# Altium PCB FPS_Anzeige_V2.PcbDoc
Units mm, origin at the board's own origin, x right, y up, seen from the top; angles counter-clockwise.
Board outline 80 x 100 mm, 4 copper layers (F.Cu, In1.Cu, In2.Cu, B.Cu); 61 components, 55 nets, 226 pads, 117 vias.
Unrouted connection lines stored in the file: 3.
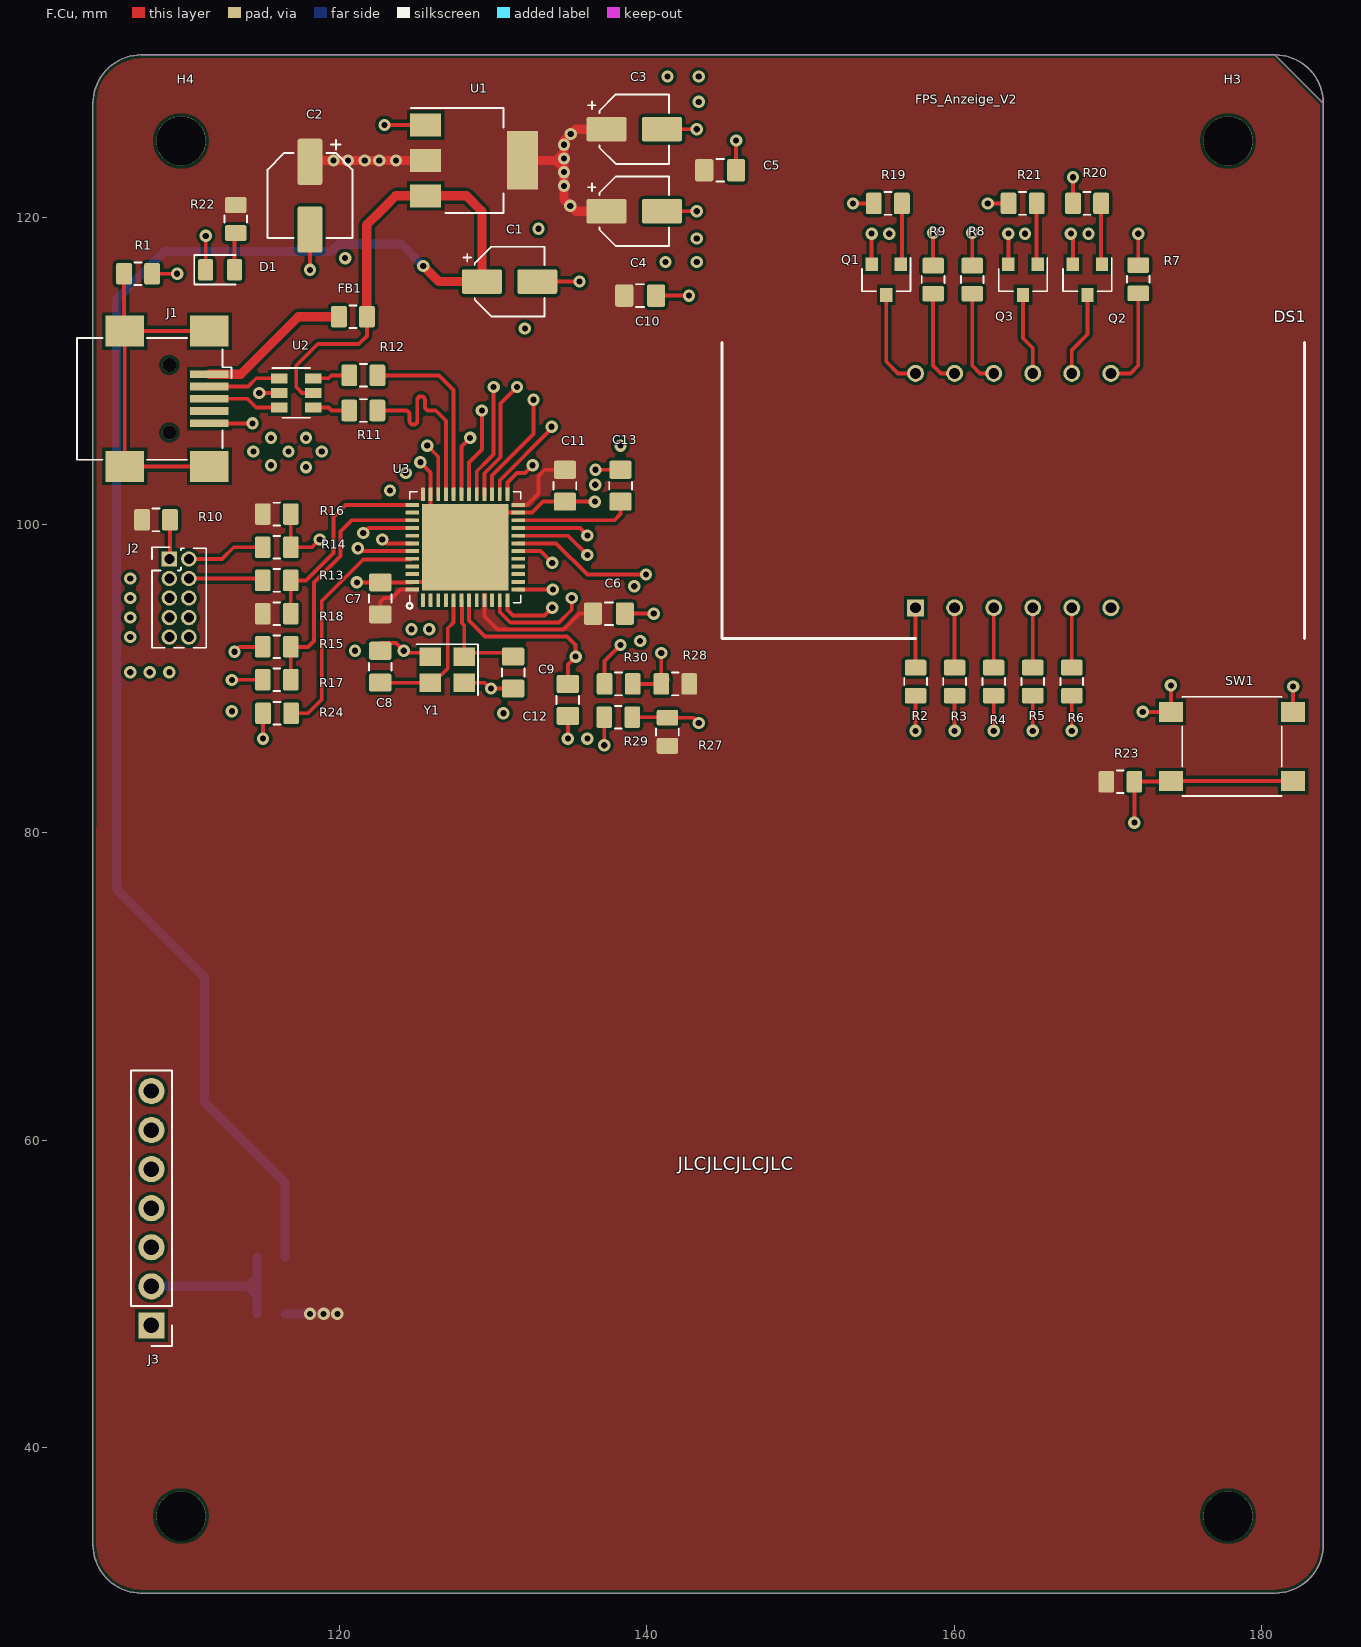
[diagram p0: F.Cu view]
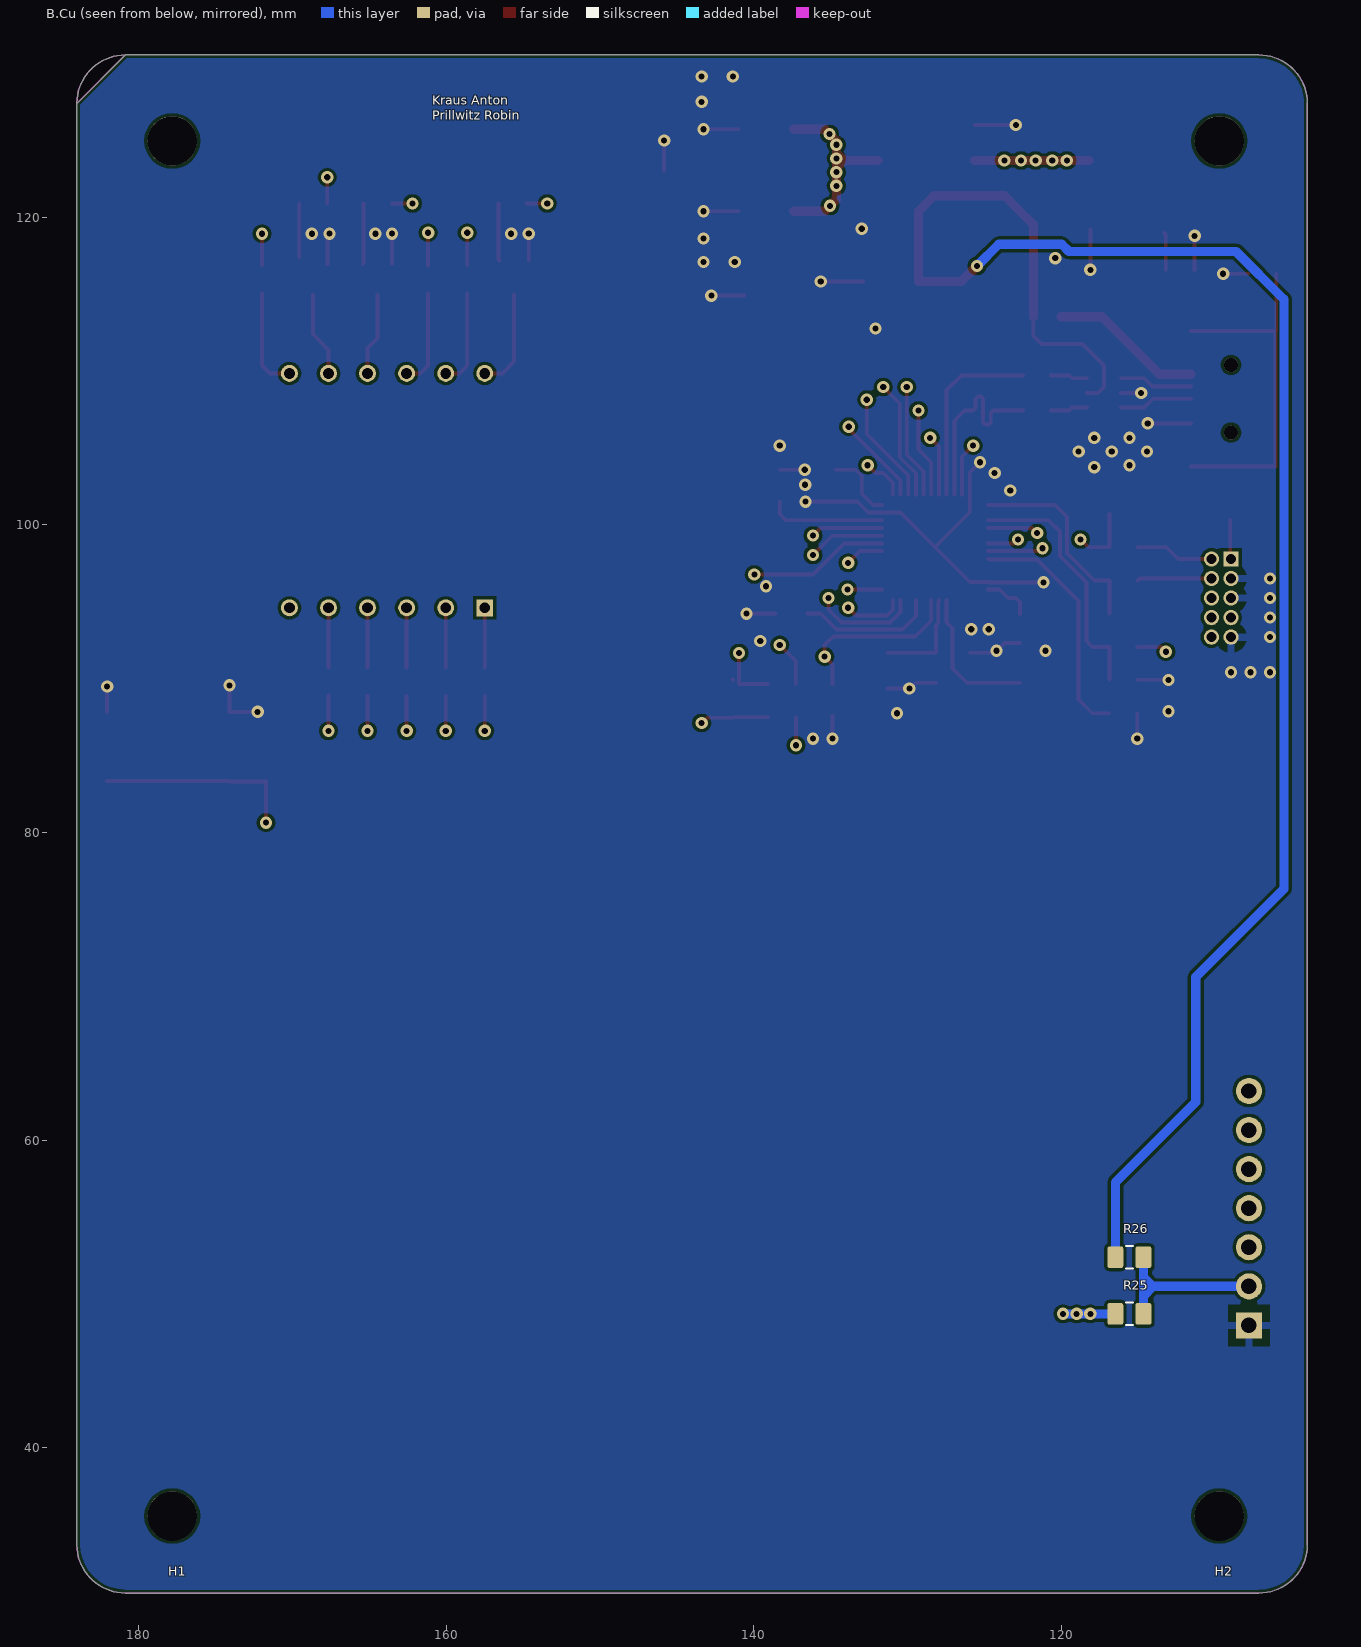
[diagram p1: B.Cu view, seen from below]
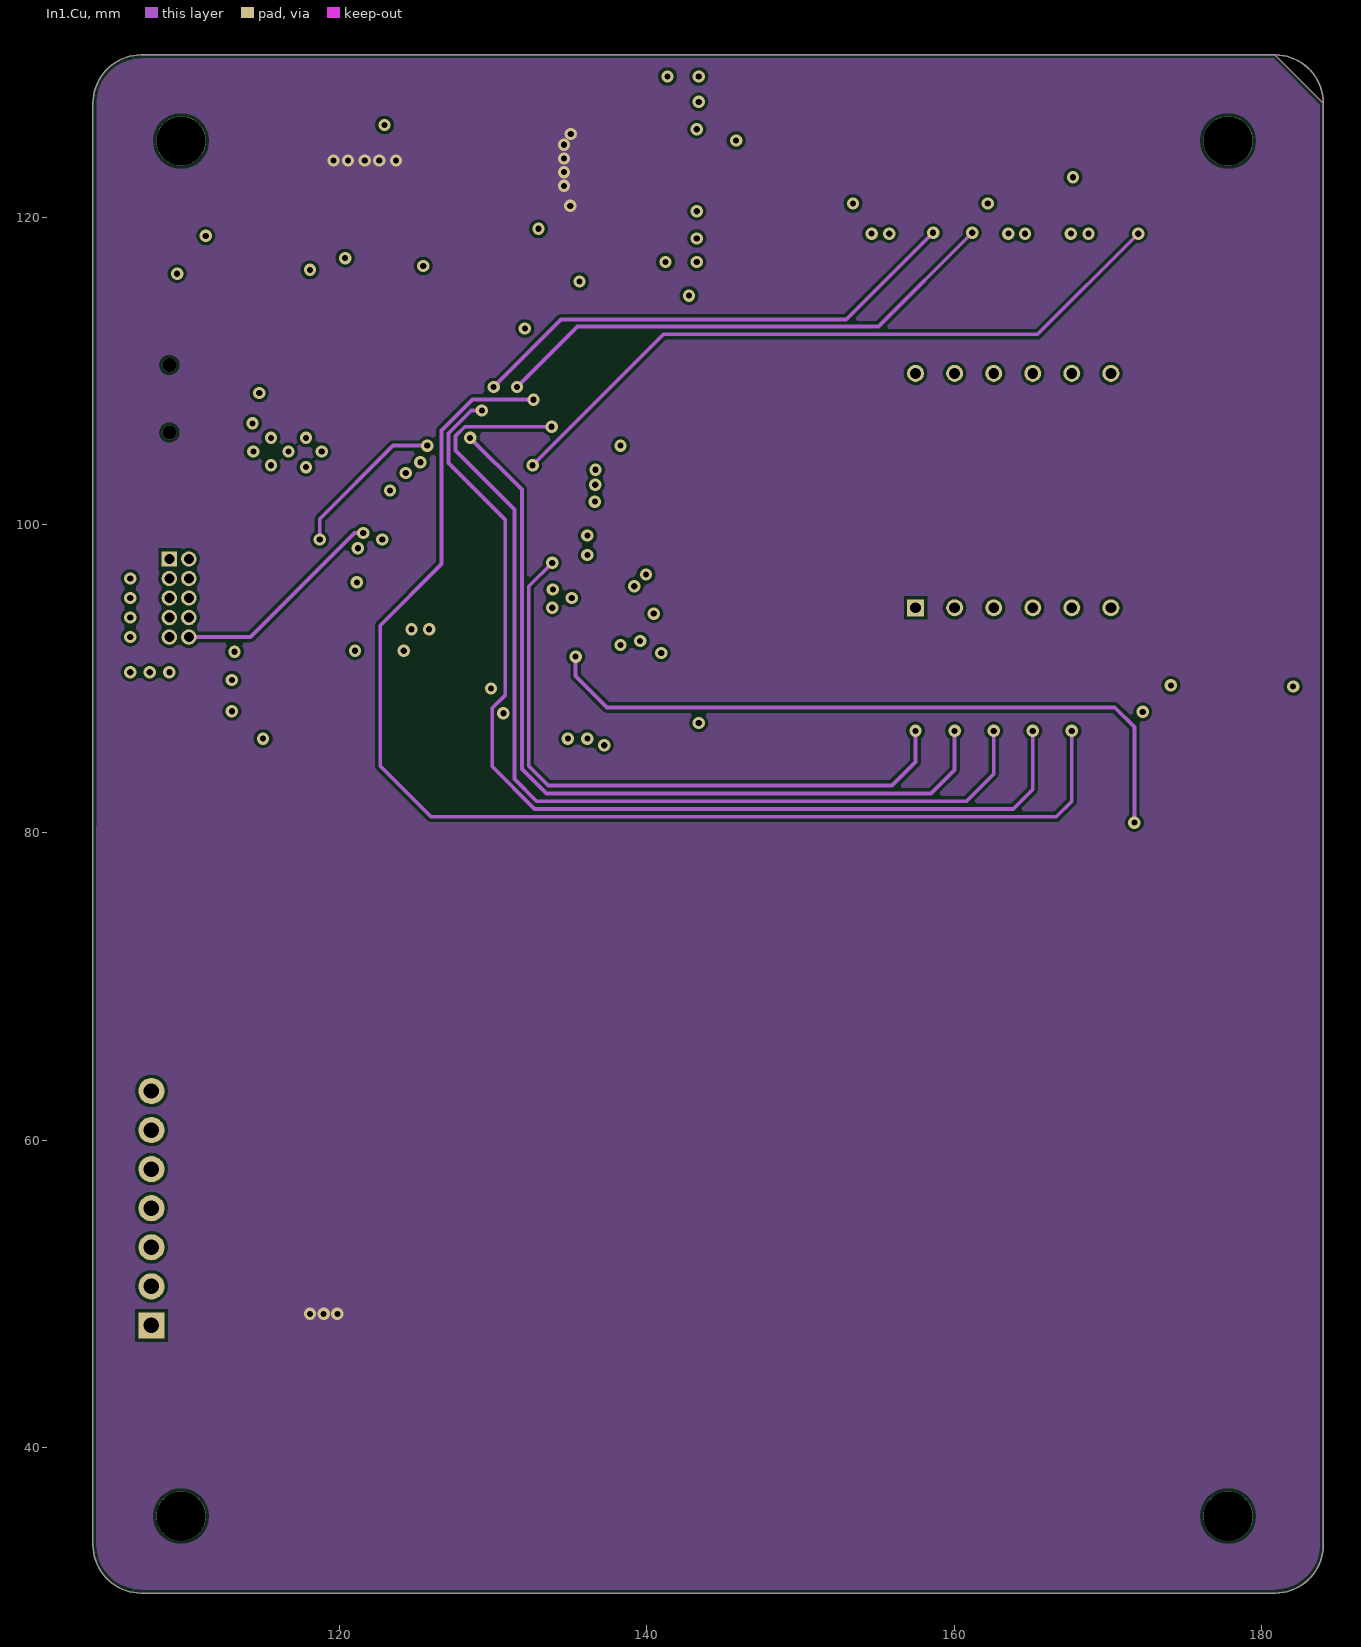
[diagram p2: In1.Cu]
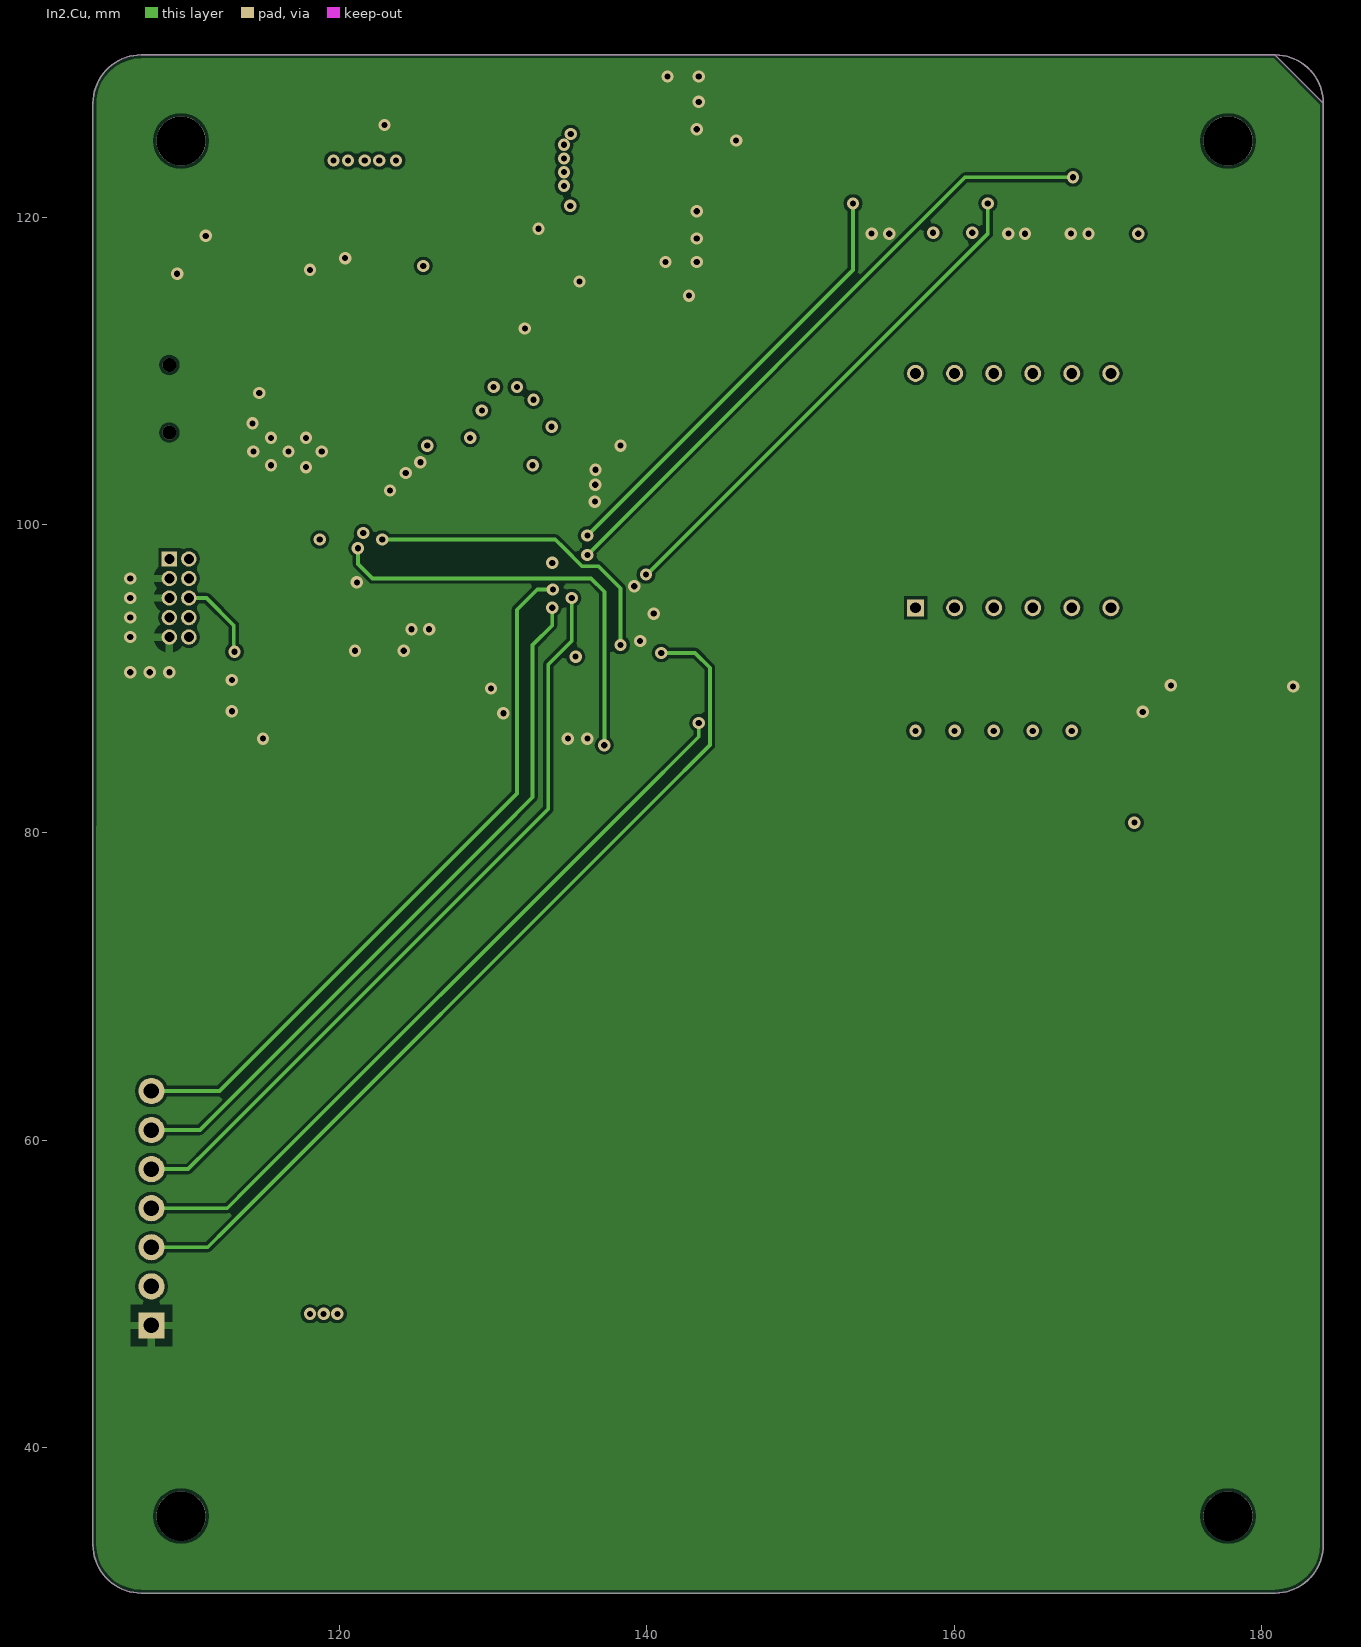
[diagram p3: In2.Cu]

## Layer stack, top to bottom
F.Mask: solder mask 0.0102, Solder Resist, Dk 3.5
F.Cu: signal copper 0.0356
Dielectric 1: dielectric 0.32, FR-4, Dk 4.8
In1.Cu: signal copper 0.0356
Dielectric2: dielectric 0.32, FR-4, Dk 4.8
In2.Cu: signal copper 0.0356
Dielectric3: dielectric 0.32, FR-4, Dk 4.8
B.Cu: signal copper 0.0356
B.Mask: solder mask 0.0102, Solder Resist, Dk 3.5

## Board outline
183.998,127.406 ccw(c180.848,127.406) 180.848,130.556 107.152,130.561 ccw(c107.152,127.411) 104.003,127.411 104,33.706 ccw(c107.15,33.706) 107.15,30.556 180.848,30.561 ccw(c180.848,33.711) 183.998,33.711 183.998,127.406 ccw(c180.848,127.406) 183.998,127.406

## Design rules (kind name [scope] priority, off if disabled: settings)
Clearance "Clearence 0,2_NetClass" [InNetClass('Default')] p1: gap=0.2 ignorepadtopadclearanceinfootprint=FALSE
Clearance "Clearence 0,2_Polygon" [InNamedPolygon('F.Cu-+3V3') OR InNamedPolygon('B.Cu-GND') OR InNamedPolygon('In1.Cu-+3V3') OR InNamedPolygon('In2.Cu-GND')] p2: gap=0.2 ignorepadtopadclearanceinfootprint=FALSE
HoleSize "Hole Size (Default)" [All] p1: absolutevalues=TRUE maxlimit=10 minlimit=0 maxpercent=80.000 minpercent=20.000
MinimumSolderMaskSliver [All] p1: minsoldermaskwidth=0
PolygonConnect Polygon_In2.Cu-GND_ConnectDirect [IsNamedPolygon('In2.Cu-GND') vs IsVia] p1: connectstyle=Direct reliefconductorwidth=0.254 reliefentries=4 polygonreliefangle="90 Angle" airgapwidth=0.254
PolygonConnect Polygon_In2.Cu-GND_ConnectRelief45 [IsNamedPolygon('In2.Cu-GND') vs (IsThruPin or IsSMTPin) and (PadShape_AllLayers = 'Round')] p2: connectstyle=Relief reliefconductorwidth=0.508 reliefentries=4 polygonreliefangle="45 Angle" airgapwidth=0.508
PolygonConnect Polygon_In2.Cu-GND_ConnectRelief90 [IsNamedPolygon('In2.Cu-GND') vs (IsThruPin or IsSMTPin) and (PadShape_AllLayers <> 'Round')] p3: connectstyle=Relief reliefconductorwidth=0.508 reliefentries=4 polygonreliefangle="90 Angle" airgapwidth=0.508
PolygonConnect Polygon_In1.Cu-+3V3_ConnectDirect [IsNamedPolygon('In1.Cu-+3V3') vs IsVia] p4: connectstyle=Direct reliefconductorwidth=0.254 reliefentries=4 polygonreliefangle="90 Angle" airgapwidth=0.254
PolygonConnect Polygon_In1.Cu-+3V3_ConnectRelief45 [IsNamedPolygon('In1.Cu-+3V3') vs (IsThruPin or IsSMTPin) and (PadShape_AllLayers = 'Round')] p5: connectstyle=Relief reliefconductorwidth=0.508 reliefentries=4 polygonreliefangle="45 Angle" airgapwidth=0.508
PolygonConnect Polygon_In1.Cu-+3V3_ConnectRelief90 [IsNamedPolygon('In1.Cu-+3V3') vs (IsThruPin or IsSMTPin) and (PadShape_AllLayers <> 'Round')] p6: connectstyle=Relief reliefconductorwidth=0.508 reliefentries=4 polygonreliefangle="90 Angle" airgapwidth=0.508
PolygonConnect Polygon_B.Cu-GND_ConnectDirect [IsNamedPolygon('B.Cu-GND') vs IsVia or IsSMTPin] p7: connectstyle=Direct reliefconductorwidth=0.254 reliefentries=4 polygonreliefangle="90 Angle" airgapwidth=0.254
PolygonConnect Polygon_B.Cu-GND_ConnectRelief45 [IsNamedPolygon('B.Cu-GND') vs IsThruPin and (PadShape_AllLayers = 'Round')] p8: connectstyle=Relief reliefconductorwidth=0.508 reliefentries=4 polygonreliefangle="45 Angle" airgapwidth=0.508
PolygonConnect Polygon_B.Cu-GND_ConnectRelief90 [IsNamedPolygon('B.Cu-GND') vs IsThruPin and (PadShape_AllLayers <> 'Round')] p9: connectstyle=Relief reliefconductorwidth=0.508 reliefentries=4 polygonreliefangle="90 Angle" airgapwidth=0.508
PolygonConnect Polygon_F.Cu-+3V3_ConnectDirect [IsNamedPolygon('F.Cu-+3V3') vs IsVia or IsSMTPin] p10: connectstyle=Direct reliefconductorwidth=0.254 reliefentries=4 polygonreliefangle="90 Angle" airgapwidth=0.254
PolygonConnect Polygon_F.Cu-+3V3_ConnectRelief45 [IsNamedPolygon('F.Cu-+3V3') vs IsThruPin and (PadShape_AllLayers = 'Round')] p11: connectstyle=Relief reliefconductorwidth=0.508 reliefentries=4 polygonreliefangle="45 Angle" airgapwidth=0.508
PolygonConnect Polygon_F.Cu-+3V3_ConnectRelief90 [IsNamedPolygon('F.Cu-+3V3') vs IsThruPin and (PadShape_AllLayers <> 'Round')] p12: connectstyle=Relief reliefconductorwidth=0.508 reliefentries=4 polygonreliefangle="90 Angle" airgapwidth=0.508
RoutingVias [All] p1: holewidth=0.711 width=1.27 viastyle="Through Hole" minholewidth=0.711 minwidth=1.27 maxholewidth=0.711 maxwidth=1.27
SilkToSilkClearance [All] p1: silktosilkclearance=0
SilkToSolderMaskClearance [IsPad] p1: minsilkscreentomaskgap=0 clearancetoexposedcopper=TRUE
SolderMaskExpansion [All] p1: expansion=0.102 istentingtop=FALSE
Width [All] p1: maxlimit=10 minlimit=0.2 preferedwidth=0.25 minimp=50.000000 maximp=50.000000 favimp=50.000000
26 further rules are at their usual default settings.

## Classes and differential pairs
net class Default: +3V3 +5V BOOT0 CS DAA DAB DAC DAD DADP DAE DAF DAG DC GND JTAG_RESET JTAG_SWDCLK JTAG_SWDIO JTAG_SWO Net-(C13-Pad1) Net-(D1-Pad2) Net-(DS1-Pad1) Net-(DS1-Pad2) Net-(DS1-Pad3) Net-(DS1-Pad4) Net-(DS1-Pad5) Net-(DS1-Pad7) Net-(DS1-Pad8) Net-(DS1-Pad9) Net-(DS1-Pad10) Net-(DS1-Pad11) Net-(DS1-Pad12) Net-(FB1-Pad2) Net-(J1-Pad2) Net-(J1-Pad3) Net-(J1-Pad6) Net-(J2-Pad1) Net-(J3-Pad2) Net-(Q1-Pad1) Net-(Q2-Pad1) Net-(Q3-Pad1) Net-(R11-Pad2) Net-(R12-Pad2) Net-(R29-Pad2) Net-(R30-Pad2) OSC_IN OSC_OUT RES RESET SCL SDA SEG_0 SEG_1 SEG_2 USBD+ USBD-

## Components (designator, comment, footprint, x,y, rotation, side; value= is the part's Value field where it differs from the comment)
C1 "10u" CP_Elec_4x4.5 131.086,115.824 r0 top
C2 "100u" CP_Elec_5x5.3 118.11,121.412 r270 top
C3 "10u" CP_Elec_4x4.5 139.192,125.73 r0 top
C4 "10u" CP_Elec_4x4.5 139.192,120.396 r0 top
C5 "100n" C_0805_2012Metric_Pad1.18x1.45mm_HandSolder 144.78,123.063 r0 top
C6 "100n" C_0805_2012Metric_Pad1.18x1.45mm_HandSolder 137.541,94.234 r0 top
C7 "100n" C_0805_2012Metric_Pad1.18x1.45mm_HandSolder 122.682,95.228 r90 top
C8 "12p" C_0805_2012Metric_Pad1.18x1.45mm_HandSolder 122.682,90.783 r90 top
C9 "12p" C_0805_2012Metric_Pad1.18x1.45mm_HandSolder 131.318,90.402 r270 top
C10 "100n" C_0805_2012Metric_Pad1.18x1.45mm_HandSolder 139.577,114.91 r0 top
C11 "100n" C_0805_2012Metric_Pad1.18x1.45mm_HandSolder 134.683,102.552 r270 top
C12 "100n" C_0805_2012Metric_Pad1.18x1.45mm_HandSolder 134.874,88.624 r270 top
C13 "100n" C_0805_2012Metric_Pad1.18x1.45mm_HandSolder 138.303,102.552 r90 top
D1 "LED" LED_0805_2012Metric 112.268,116.586 r0 top
DS1 "BC56-12EWA" DIPS1524W50P254L3760H835Q12N 157.48,94.615 r90 top
FB1 "Ferrite_Bead" R_0805_2012Metric#1 120.904,113.538 r180 top
H1 "MountingHole" MountingHole_3.2mm_M3_DIN965 177.8,35.56 r180 bottom
H2 "MountingHole" MountingHole_3.2mm_M3_DIN965 109.728,35.56 r180 bottom
H3 "MountingHole" MountingHole_3.2mm_M3_DIN965 177.8,124.968 r0 top
H4 "MountingHole" MountingHole_3.2mm_M3_DIN965 109.728,124.968 r0 top
J1 "USB_B_Mini" USB_Mini-B_Wuerth_65100516121_Horizontal 108.966,108.204 r270 top
J2 "Conn_ARM_JTAG_SWD_10" PinHeader_2x05_P1.27mm_Vertical 108.966,97.79 r0 top
J3 "Conn_01x07" PinHeader_1x07_P2.54mm_Vertical 107.8,47.96 r180 top
Q1 "BC817" SOT-23 155.575,115.951 r270 top
Q2 "BC817" SOT-23 168.656,115.951 r270 top
Q3 "BC817" SOT-23 164.465,115.951 r270 top
R1 "33k" R_0805_2012Metric#1 106.934,116.332 r0 top
R2 "100" R_0805_2012Metric#1 157.48,89.813 r270 top
R3 "100" R_0805_2012Metric#1 160.02,89.813 r270 top
R4 "100" R_0805_2012Metric#1 162.56,89.813 r270 top
R5 "100" R_0805_2012Metric#1 165.1,89.813 r270 top
R6 "100" R_0805_2012Metric#1 167.64,89.816 r270 top
R7 "100" R_0805_2012Metric#1 171.958,115.975 r90 top
R8 "100" R_0805_2012Metric#1 161.163,115.951 r90 top
R9 "100" R_0805_2012Metric#1 158.623,115.951 r90 top
R10 "100" R_0805_2012Metric#1 108.101,100.33 r0 top
R11 "15" R_0805_2012Metric#1 121.579,107.442 r180 top
R12 "15" R_0805_2012Metric#1 121.579,109.728 r180 top
R13 "33" R_0805_2012Metric#1 115.951,96.393 r180 top
R14 "33" R_0805_2012Metric#1 115.951,98.552 r180 top
R15 "33" R_0805_2012Metric#1 115.951,92.075 r180 top
R16 "10k" R_0805_2012Metric#1 115.951,100.711 r0 top
R17 "10k" R_0805_2012Metric#1 115.953,89.941 r180 top
R18 "10k" R_0805_2012Metric#1 115.951,94.234 r0 top
R19 "10k" R_0805_2012Metric#1 155.678,120.904 r0 top
R20 "10k" R_0805_2012Metric#1 168.632,120.904 r0 top
R21 "10k" R_0805_2012Metric#1 164.441,120.904 r0 top
R22 "470" R_0805_2012Metric#1 113.284,119.888 r270 top
R23 "NC" R_0805_2012Metric#1 170.791,83.312 r0 top
R24 "100k" R_0805_2012Metric#1 115.975,87.757 r180 top
R25 "0R" R_0805_2012Metric#2 115.57,48.711 r0 bottom
R26 "0R" R_0805_2012Metric#2 115.57,52.394 r0 bottom
R27 "4.7k" R_0805_2012Metric#1 141.351,86.55 r90 top
R28 "4.7k" R_0805_2012Metric#1 141.859,89.662 r180 top
R29 "33" R_0805_2012Metric#1 138.176,89.662 r180 top
R30 "33" R_0805_2012Metric#1 138.152,87.503 r180 top
SW1 "SW_Push" SW_Push_1P1T_NO_6x6mm_H9.5mm 178.054,85.598 r180 top
U1 "AMS1117-3.3" SOT-223-3_TabPin2 128.778,123.698 r0 top
U2 "USBLC6-2SC6" SOT-23-6 117.221,108.585 r0 top
U3 "STM32F411CCUx" QFN-48-1EP_7x7mm_P0.5mm_EP5.6x5.6mm 128.202,98.552 r90 top
Y1 "Crystal_GND24" Crystal_SMD_3225-4Pin_3.2x2.5mm 127.043,90.59 r180 top

## Footprints (in the part's own frame and the unit in brackets; to place one, negate y for a bottom-side part, rotate by r counter-clockwise, add the part's x,y. Pads: shape width x height; smd on the part's side, far side on the other; paste and mask are expansions set on the pad)
C_0805_2012Metric_Pad1.18x1.45mm_HandSolder [mm]
  rrect21% 1.175x1.45 smd mask+0: 1(-1.038,0) 2(1.038,0)
  silkscreen extent -0.26,-0.73 0.26,0.73
CP_Elec_4x4.5 [mm]
  rrect16% 2.6x1.6 smd mask+0: 1(-1.8,0) 2(1.8,0)
  silkscreen extent -3,-2.26 2.26,2.26
CP_Elec_5x5.3 [mm]
  rrect16% 3x1.6 smd mask+0: 1(-2.2,0) 2(2.2,0)
  silkscreen extent -3.62,-2.76 2.76,2.76
Crystal_SMD_3225-4Pin_3.2x2.5mm [mm]
  rect 1.4x1.2 smd mask+0: 1(-1.1,-0.85) 2(1.1,-0.85) 3(1.1,0.85) 4(-1.1,0.85)
  silkscreen extent -2,-1.65 2,1.65
DIPS1524W50P254L3760H835Q12N [mm]
  rect 1.1x1.1 hole 0.7 paste-1.1 mask+0: 1(0,0)
  round 1.1 hole 0.7 paste-1.1 mask+0: 2(0,-2.54) 3(0,-5.08) 4(0,-7.62) 5(0,-10.16) 6(0,-12.7) 7(15.24,-12.7) 8(15.24,-10.16) 9(15.24,-7.62) 10(15.24,-5.08) 11(15.24,-2.54) 12(15.24,0)
  silkscreen extent -2,-25.27 17.24,12.57
LED_0805_2012Metric [mm]
  rrect25% 0.975x1.4 smd mask+0: 1(-0.937,0) 2(0.937,0)
  silkscreen extent -1.69,-0.96 1,0.96
MountingHole_3.2mm_M3_DIN965 [mm]
  round 3.2 hole 3.2 paste-3.2 mask+0: 1(0,0)
PinHeader_1x07_P2.54mm_Vertical [mm]
  rect 1.7x1.7 hole 1 paste-1.7 mask+0: 1(0,0)
  rrect100% 1.7x1.7 hole 1 paste-1.7 mask+0: 2(0,-2.54) 3(0,-5.08) 4(0,-7.62) 5(0,-10.16) 6(0,-12.7) 7(0,-15.24)
  silkscreen extent -1.33,-16.57 1.33,1.33
PinHeader_2x05_P1.27mm_Vertical [mm]
  rect 1x1 hole 0.65 paste-1 mask+0: 1(0,0)
  rrect100% 1x1 hole 0.65 paste-1 mask+0: 2(1.27,0) 3(0,-1.27) 4(1.27,-1.27) 5(0,-2.54) 6(1.27,-2.54) 7(0,-3.81) 8(1.27,-3.81) 9(0,-5.08) 10(1.27,-5.08)
  silkscreen extent -1.13,-5.77 2.4,0.76
QFN-48-1EP_7x7mm_P0.5mm_EP5.6x5.6mm [mm]
  rrect25% 0.875x0.25 smd mask+0: 1(-3.437,2.75) 2(-3.437,2.25) 3(-3.437,1.75) 4(-3.437,1.25) 5(-3.437,0.75) 6(-3.437,0.25) 7(-3.437,-0.25) 8(-3.437,-0.75) 9(-3.437,-1.25) 10(-3.437,-1.75) 11(-3.437,-2.25) 12(-3.437,-2.75) 25(3.437,-2.75) 26(3.437,-2.25) 27(3.437,-1.75) 28(3.437,-1.25) 29(3.437,-0.75) 30(3.437,-0.25) 31(3.437,0.25) 32(3.437,0.75) 33(3.437,1.25) 34(3.437,1.75) 35(3.437,2.25) 36(3.437,2.75)
  rrect25% 0.25x0.875 smd mask+0: 13(-2.75,-3.437) 14(-2.25,-3.437) 15(-1.75,-3.437) 16(-1.25,-3.437) 17(-0.75,-3.437) 18(-0.25,-3.437) 19(0.25,-3.437) 20(0.75,-3.437) 21(1.25,-3.437) 22(1.75,-3.437) 23(2.25,-3.437) 24(2.75,-3.437) 37(2.75,3.437) 38(2.25,3.437) 39(1.75,3.437) 40(1.25,3.437) 41(0.75,3.437) 42(0.25,3.437) 43(-0.25,3.437) 44(-0.75,3.437) 45(-1.25,3.437) 46(-1.75,3.437) 47(-2.25,3.437) 48(-2.75,3.437)
  rect 5.6x5.6 smd paste-5.6 mask+0: 49(0,0)
  rrect22% 1.13x1.13 on Top Paste mask-1.13: Un1(2.1,-2.1) Un2(2.1,-0.7) Un3(2.1,0.7) Un4(2.1,2.1) Un5(0.7,-2.1) Un6(0.7,-0.7) Un7(0.7,0.7) Un8(0.7,2.1) Un9(-0.7,-2.1) Un10(-0.7,-0.7) Un11(-0.7,0.7) Un12(-0.7,2.1) Un13(-2.1,-2.1) Un14(-2.1,-0.7) Un15(-2.1,0.7) Un16(-2.1,2.1)
  silkscreen extent -3.61,-3.61 3.61,3.61
R_0805_2012Metric#1 [mm]
  rrect24% 1.025x1.4 smd mask+0: 1(-0.913,0) 2(0.913,0)
  silkscreen extent -0.23,-0.73 0.23,0.73
R_0805_2012Metric#2 [mm]
  rrect24% 1.025x1.4 smd mask+0: 1(0.913,0) 2(-0.913,0)
  silkscreen extent -0.23,-0.73 0.23,0.73
SOT-23 [mm]
  rect 0.9x0.8 smd mask+0: 1(-1,0.95) 2(-1,-0.95) 3(1,0)
  silkscreen extent -1.4,-1.58 0.76,1.58
SOT-23-6 [mm]
  rect 1.06x0.65 smd mask+0: 1(-1.1,0.95) 2(-1.1,0) 3(-1.1,-0.95) 4(1.1,-0.95) 5(1.1,0) 6(1.1,0.95)
  silkscreen extent -1.55,-1.61 0.9,1.61
SOT-223-3_TabPin2 [mm]
  rect 2x1.5 smd mask+0: 1(-3.15,2.3) 2(-3.15,0) 3(-3.15,-2.3)
  rect 2x3.8 smd mask+0: 2(3.15,0)
  silkscreen extent -4.1,-3.41 1.91,3.41
SW_Push_1P1T_NO_6x6mm_H9.5mm [mm]
  rect 1.55x1.3 smd mask+0: 1(-3.975,2.25) 1(3.975,2.25) 2(-3.975,-2.25) 2(3.975,-2.25)
  silkscreen extent -3.23,-3.23 3.23,3.23
USB_Mini-B_Wuerth_65100516121_Horizontal [mm]
  rect 0.5x2.5 smd mask+0: 1(-1.6,2.6) 2(-0.8,2.6) 3(0,2.6) 4(0.8,2.6) 5(1.6,2.6)
  rect 2x2.5 smd mask+0: 6(-4.4,2.6) 6(-4.4,-2.9) 6(4.4,2.6) 6(4.4,-2.9)
  round 0.9 hole 0.9 paste-0.9 mask+0: Un1(2.2,0) Un2(-2.2,0)
  silkscreen extent -3.96,-6.01 3.96,4.05

## Part data
C1 C3 C4: library part CP_Elec_4x4.5, "SMD capacitor, aluminum electrolytic, Nichicon, 4.0x4.5mm"
C2: library part CP_Elec_5x5.3, "SMD capacitor, aluminum electrolytic, Nichicon, 5.0x5.3mm"
C5 C6 C7 C8 C9 C10 C11 C12 C13: library part C_0805_2012Metric_Pad1.18x1.45mm_HandSolder, "Capacitor SMD 0805 (2012 Metric), square (rectangular) end terminal, IPC_7351 nominal with elongated pad for handsoldering. (Body size source: IPC-SM-782 page 76, https://www.pcb-3d.com/wordpress/wp-content/uploads/ipc-sm-782a_amendment_1_and_2.pdf, https://docs.google.com/spreadsheets/d/1BsfQQcO9C6DZCsRaXUlFlo91Tg2WpOkGARC1WS5S8t0/edit?usp=sharing), generated with kicad-footprint-generator"
D1: library part LED_0805_2012Metric, "LED SMD 0805 (2012 Metric), square (rectangular) end terminal, IPC_7351 nominal, (Body size source: https://docs.google.com/spreadsheets/d/1BsfQQcO9C6DZCsRaXUlFlo91Tg2WpOkGARC1WS5S8t0/edit?usp=sharing), generated with kicad-footprint-generator"
DS1: library part DIPS1524W50P254L3760H835Q12N, "BC56-12EWA_A"
FB1 R1 R2 R3 R4 R5 R6 R7 R8 R9 R10 R11 R12 R13 R14 R15 R16 R17 R18 R19 R20 R21 R22 R23 R24 R25 R26 R27 R28 R29 R30: library part R_0805_2012Metric, "Resistor SMD 0805 (2012 Metric), square (rectangular) end terminal, IPC_7351 nominal, (Body size source: IPC-SM-782 page 72, https://www.pcb-3d.com/wordpress/wp-content/uploads/ipc-sm-782a_amendment_1_and_2.pdf), generated with kicad-footprint-generator"
H1 H2 H3 H4: library part MountingHole_3.2mm_M3_DIN965, "Mounting Hole 3.2mm, no annular, M3, DIN965"
J1: library part USB_Mini-B_Wuerth_65100516121_Horizontal, "Mini USB 2.0 Type B SMT Horizontal 5 Contacts (https://katalog.we-online.de/em/datasheet/65100516121.pdf)"
J2: library part PinHeader_2x05_P1.27mm_Vertical, "Through hole straight pin header, 2x05, 1.27mm pitch, double rows"
J3: library part PinHeader_1x07_P2.54mm_Vertical, "Through hole straight pin header, 1x07, 2.54mm pitch, single row"
Q1 Q2 Q3: library part SOT-23, "SOT-23, Standard"
SW1: library part SW_Push_1P1T_NO_6x6mm_H9.5mm, "tactile push button, 6x6mm e.g. PTS645xx series, height=9.5mm"
U1: library part SOT-223-3_TabPin2, "module CMS SOT223 4 pins"
U2: library part SOT-23-6, "6-pin SOT-23 package"
U3: library part QFN-48-1EP_7x7mm_P0.5mm_EP5.6x5.6mm, "QFN, 48 Pin (http://www.st.com/resource/en/datasheet/stm32f042k6.pdf#page=94), generated with kicad-footprint-generator ipc_noLead_generator.py"
Y1: library part Crystal_SMD_3225-4Pin_3.2x2.5mm, "SMD Crystal SERIES SMD3225/4 http://www.txccrystal.com/images/pdf/7m-accuracy.pdf, 3.2x2.5mm^2 package"

## Via types
v1: diameter 0.8, hole 0.4, F.Cu to B.Cu, tented both sides, 117 vias

## Nets (pads, with @x,y where several pads share a name; then routed paths per layer and width w, separated by ;. In a path a pad name is that pad's centre, name@x,y a point inside that pad or via, vN(x,y) a via of type N, cw(c..) or ccw(c..) an arc to the next point about the centre after c; other vN are vias at no path point)
+3V3: C2.1 C3.1 C4.1 C5.1 C6.1 C7.1 C10.1 C11.1 R10.1 R16.1 R18.1 R22.1 R23.1 R25.1 R27.1 R28.1 U1.2 U3.9 U3.24 U3.36 U3.48 | length 43.1
  F.Cu w0.25: C7.1 122.682,94.996 122.936,95.25 123.444,95.25 123.996,95.802 U3.48 ; U3.9 129.452,94.068 130.313,93.207 134.609,93.207 135.636,94.234 C6.1 ; U3.24 132.226,101.302 132.969,102.044 132.969,103.188 133.372,103.59 C11.1
  F.Cu w0.6: C2.1@118.196,123.698 v1(119.634,123.698) v1(120.587,123.698) v1(121.666,123.698) v1(122.618,123.698) v1(123.698,123.698) U1.2@125.628,123.698 ; U1.2@131.928,123.698 134.112,123.698 ; C4.1 135.382,120.396 v1(135.033,120.745) 135.001,120.777 134.62,121.158 134.62,121.92 v1(134.62,122.047) v1(134.62,122.936) v1@134.62,123.19 ; C3.1 135.382,125.73 v1(135.064,125.412) v1@134.62,124.968 ; 134.112,123.698 134.62,124.206 v1@134.62,124.968 ; 134.112,123.698 134.366,123.698 v1@134.62,123.952 ; 134.112,123.698 v1@134.62,123.698 ; 134.112,123.698 v1@134.62,123.19 ; v1@134.62,123.19 v1@134.62,123.698 ; v1@134.62,123.698 v1(134.62,123.825) v1@134.62,123.952 ; v1@134.62,123.952 v1(134.62,124.714) v1@134.62,124.968
  B.Cu w0.6: R25.1 v1(118.11,48.711) v1(118.999,48.711) v1(119.888,48.711)
+5V: C1.1 FB1.1 R26.1 U1.3 U2.5 | length 121.6
  F.Cu w0.25: U2.5 117.602,108.585 117.221,108.966 117.221,110.363 118.618,111.76 121.285,111.76 121.817,112.292 FB1.1
  F.Cu w0.6: FB1.1@121.804,113.538 121.804,119.518 122.82,120.534 123.684,121.398 U1.3 128.284,121.398 129.286,120.396 C1.1 126.492,115.824 v1(125.476,116.84)
  B.Cu w0.6: R26.1 116.483,56.053 116.483,57.253 111.252,62.484 111.252,70.612 105.526,76.338 105.526,114.67 108.636,117.78 119.496,117.78 119.964,118.248 124.068,118.248 v1(125.476,116.84)
BOOT0: R24.1 U3.44 | length 16
  F.Cu w0.25: R24.1 117.983,87.757 118.872,88.646 118.872,93.789 118.872,95.053 121.571,97.752 122.009,97.752 ; 121.819,97.752 122.009,97.752 ; U3.44 124.726,97.802 124.676,97.752 122.009,97.752
CS: J3.7 U3.13 | length 48.9
  F.Cu w0.25: U3.13 v1(133.902,95.802) v1@133.941,95.802
  In2.Cu w0.25: J3.7 112.222,63.2 113.691,64.669 131.573,82.551 131.573,94.489 132.886,95.802 v1(133.902,95.802)
DAA: R9.2 U3.29 | length 42.8
  F.Cu w0.25: 128.952,102.536 U3.29 128.952,103.495 129.757,104.3 130.048,104.591 v1(130.048,108.966) ; R9.2 v1(158.623,118.999)
  In1.Cu w0.25: v1(130.048,108.966) 134.435,113.353 152.977,113.353 v1(158.623,118.999)
DAB: R7.2 U3.25 | length 58.5
  F.Cu w0.25: 130.952,102.631 U3.25 130.952,102.758 131.572,103.378 132.08,103.378 v1(132.588,103.886) ; R7.2 v1(171.958,118.935)
  In1.Cu w0.25: 137.795,109.093 v1(132.588,103.886) 141.097,112.395 165.417,112.395 v1(171.958,118.935)
DAC: R5.2 U3.30 | length 75
  F.Cu w0.25: U3.30 128.452,104.068 129.286,104.902 v1(129.286,107.442) ; v1(165.1,86.614) R5.2
  In1.Cu w0.25: v1(129.286,107.442) 128.593,107.442 127.116,105.965 127.116,104.024 130.81,100.33 130.81,88.957 129.958,88.105 129.958,84.29 132.714,81.534 163.83,81.534 165.1,82.804 v1(165.1,86.614)
DAD: R3.2 U3.31 | length 61.1
  F.Cu w0.25: U3.31 127.952,105.092 v1(128.524,105.664) ; v1(160.02,86.614) R3.2
  In1.Cu w0.25: v1(128.524,105.664) 131.884,102.304 131.884,84.142 133.476,82.55 158.496,82.55 160.02,84.074 v1(160.02,86.614)
DADP: R4.2 U3.26 | length 73.8
  F.Cu w0.25: U3.26 130.452,102.894 133.821,106.263 v1(133.821,106.389) ; v1(162.56,86.614) R4.2
  In1.Cu w0.25: v1(133.821,106.389) 128.176,106.389 127.566,105.779 127.566,104.844 131.408,101.002 131.408,83.476 132.842,82.042 160.782,82.042 162.56,83.82 v1(162.56,86.614)
DAE: R2.2 U3.18 | length 47
  F.Cu w0.25: U3.18 133.092,98.302 v1(133.858,97.536) ; v1(157.48,86.614) R2.2
  In1.Cu w0.25: v1(133.858,97.536) 132.334,96.012 132.334,84.328 133.604,83.058 155.956,83.058 157.48,84.582 v1(157.48,86.614)
DAF: R8.2 U3.28 | length 43.7
  F.Cu w0.25: U3.28 129.452,103.359 130.207,104.114 130.498,104.405 130.498,107.892 v1(131.572,108.966) ; R8.2 v1(161.163,118.999)
  In1.Cu w0.25: v1(131.572,108.966) 135.509,112.903 155.067,112.903 v1(161.163,118.999)
DAG: R6.2 U3.27 | length 93.2
  F.Cu w0.25: U3.27 129.952,103.222 132.648,105.918 v1(132.648,108.144) ; v1(167.64,86.614) R6.2
  In1.Cu w0.25: 128.142,81.026 129.794,81.026 ; 131.949,81.026 132.334,81.026 ; v1(132.648,108.144) 132.625,108.167 128.681,108.167 126.666,106.152 126.666,104.474 126.666,97.456 122.682,93.472 122.682,84.328 125.984,81.026 129.794,81.026 ; v1(167.64,86.614) 167.64,82.042 166.624,81.026 132.334,81.026 ; 129.794,81.026 132.334,81.026
DC: J3.6 U3.12 | length 50.7
  F.Cu w0.25: U3.12 130.952,94.473 131.318,94.107 133.35,94.107 v1(133.858,94.615)
  In2.Cu w0.25: J3.6 110.952,60.66 112.626,62.334 130.429,80.137 ; 130.556,80.264 130.429,80.137 ; v1(133.858,94.615) 133.858,93.472 132.588,92.202 132.588,82.296 130.429,80.137
GND: C1.2 C2.2 C3.2 C4.2 C5.2 C6.2 C7.2 C8.2 C9.2 C10.2 C11.2 C12.2 C13.2 D1.1 J1.5 J2.3 J2.5 J2.9 J3.1 Q1.2 Q2.2 Q3.2 R1.2 R17.2 R24.2 SW1.2 U1.1 U2.2 U3.23 U3.35 U3.47 U3.49 Y1.2 Y1.4 | length 76.2
  F.Cu w0.25: R1.2 v1(109.474,116.332) ; D1.1 v1(111.331,118.793) ; J1.5 v1(114.376,106.604) ; v1(113.03,89.916) 113.055,89.941 R17.2 ; v1@114.681,108.585 v1(114.808,108.585) 114.935,108.585 U2.2 ; v1(115.062,86.106) 115.062,86.36 115.062,86.614 R24.2 ; v1(118.11,116.586) C2.2 ; v1(121.158,96.266) C7.2 124.729,96.266 U3.47 125.952,96.302 U3.49 ; C8.2@122.682,92.329 123.698,92.329 v1(124.206,91.821) ; v1(122.95,125.998) U1.1 ; v1@123.952,92.075 v1(124.206,91.821) ; v1@125.222,104.14 v1(125.285,104.076) 125.952,103.41 U3.35 125.952,100.802 U3.49 ; Y1.2@125.943,91.694 124.333,91.694 v1(124.206,91.821) ; Y1.4 129.462,89.74 129.731,89.471 129.837,89.365 v1(129.878,89.365) C9.2 ; C1.2 v1(135.636,115.824) ; v1(134.874,86.106) C12.2 ; v1@136.61,103.59 v1(136.674,103.59) C13.2 ; v1@136.694,101.515 v1(136.63,101.515) C11.2 133.265,101.515 132.552,100.802 U3.23 130.452,100.802 U3.49 ; C6.2 v1(140.462,94.234) ; C10.2 v1(142.748,114.91) ; C4.2 v1(143.256,120.396) ; C3.2 v1(143.256,125.73) ; C5.2 v1(145.818,124.99) ; Q1.2@154.625,117.178 154.625,118.679 v1(154.625,118.938) ; Q3.2 v1(163.515,118.938) ; v1(167.579,118.938) 167.706,118.811 Q2.2 ; v1(172.248,87.848) 174.079,87.848 v1(174.079,89.573) ; SW1.2@182.029,87.848 v1(182.029,89.497)
  other v1: 136.144,86.106 130.683,87.757 113.03,87.884 106.426,90.424 107.696,90.424 108.966,90.424 121.031,91.821 139.573,92.456 106.426,92.71 124.714,93.218 125.857,93.218 106.426,93.98 106.426,95.25 139.192,96.012 106.426,96.52 123.317,102.235 136.652,102.616 124.333,103.378 117.856,103.759 115.57,103.886 114.427,104.775 116.713,104.775 118.872,104.775 138.303,105.156 115.57,105.664 117.856,105.664 132.08,112.776 141.224,117.094 143.256,117.094 120.396,117.348 143.256,118.618 155.766,118.935 164.592,118.935 168.719,118.935 132.969,119.253 143.383,127.508 141.351,129.159 143.383,129.159
JTAG_RESET: J2.10 U3.40 | length 17.5
  F.Cu w0.25: v1(121.571,99.473) 121.9,99.802 U3.40
  In1.Cu w0.25: J2.10 113.284,92.71 114.242,92.71 121.005,99.473 v1(121.571,99.473)
JTAG_SWDCLK: J2.4 R13.1 R13.2 R18.2 U3.37 | length 18.3
  F.Cu w0.25: J2.4 114.911,96.52 R13.2 ; R18.2 R13.1 117.856,96.393 119.634,98.171 119.634,100.52 120.415,101.302 U3.37
JTAG_SWDIO: J2.2 R14.1 R14.2 R16.2 U3.34 | length 23.1
  F.Cu w0.25: J2.2 112.395,97.79 113.157,98.552 R14.2 ; R16.2 R14.1 118.237,98.552 v1(118.745,99.06) ; v1(125.73,105.156) 126.452,104.434 U3.34
  In1.Cu w0.25: v1(118.745,99.06) 118.745,100.387 123.514,105.156 v1(125.73,105.156)
JTAG_SWO: J2.6 R15.1 R15.2 R17.1 U3.39 | length 24
  F.Cu w0.25: v1(113.2,91.76) 113.515,92.075 113.538,92.075 R15.2 ; R17.1 116.864,89.943 R15.1 117.983,92.075 118.364,92.456 118.364,96.265 120.084,97.985 120.084,99.574 120.812,100.302 U3.39
  In2.Cu w0.25: J2.6 111.379,95.25 113.157,93.472 113.157,91.803 v1(113.2,91.76)
Net-(C13-Pad1): C13.1 U3.22 | length 7.6
  F.Cu w0.25: U3.22 137.894,100.302 138.303,100.711 C13.1
Net-(D1-Pad2): D1.2 R22.2 | length 2.4
  F.Cu w0.25: D1.2 113.205,118.897 R22.2
Net-(DS1-Pad1): DS1.1 R2.1 | length 3.9
  F.Cu w0.25: R2.1 DS1.1
Net-(DS1-Pad2): DS1.2 R3.1 | length 3.9
  F.Cu w0.25: R3.1 DS1.2
Net-(DS1-Pad3): DS1.3 R4.1 | length 3.9
  F.Cu w0.25: R4.1 DS1.3
Net-(DS1-Pad4): DS1.4 R5.1 | length 3.9
  F.Cu w0.25: R5.1 DS1.4
Net-(DS1-Pad5): DS1.5 R6.1 | length 3.9
  F.Cu w0.25: R6.1 DS1.5
Net-(DS1-Pad7): DS1.7 R7.1 | length 6.7
  F.Cu w0.25: DS1.7 171.45,109.855 171.958,110.363 R7.1
Net-(DS1-Pad8): DS1.8 Q2.3 | length 5.5
  F.Cu w0.25: DS1.8 167.64,111.379 168.656,112.395 Q2.3
Net-(DS1-Pad9): DS1.9 Q3.3 | length 5.4
  F.Cu w0.25: Q3.3 164.465,112.141 165.1,111.506 DS1.9
Net-(DS1-Pad10): DS1.10 R8.1 | length 6.3
  F.Cu w0.25: R8.1 161.163,110.363 161.671,109.855 DS1.10
Net-(DS1-Pad11): DS1.11 R9.1 | length 6.3
  F.Cu w0.25: R9.1 158.623,110.363 159.131,109.855 DS1.11
Net-(DS1-Pad12): DS1.12 Q1.3 | length 6.6
  F.Cu w0.25: Q1.3@155.575,114.978 155.575,110.617 156.337,109.855 DS1.12
Net-(FB1-Pad2): FB1.2 J1.1 | length 10
  F.Cu w0.6: J1.1 113.614,109.804 117.348,113.538 FB1.2@120.004,113.538
Net-(J1-Pad2): J1.2 U2.1 | length 4.8
  F.Cu w0.2: J1.2 J1.2@111.572,109.01
  F.Cu w0.25: J1.2 114.084,109.004 114.615,109.535 U2.1
Net-(J1-Pad3): J1.3 U2.3 | length 4.8
  F.Cu w0.25: J1.3 114.046,108.204 114.615,107.635 U2.3
Net-(J1-Pad6): J1.6 R1.1 | length 23.5
  F.Cu w0.25: R1.1 106.021,112.648 J1.6@106.066,112.604 ; J1.6@111.566,103.804 106.066,103.804 J1.6@106.066,112.604 ; J1.6@111.566,112.604 J1.6@106.066,112.604
Net-(J2-Pad1): J2.1 R10.2 | length 2.6
  F.Cu w0.25: J2.1 109.013,97.837 R10.2
Net-(J3-Pad2): J3.2 R25.2 R26.2 | length 13.2
  B.Cu w0.6: J3.2 109.74,50.5 ; 110.482,50.5 109.74,50.5 ; 113.919,50.489 114.634,50.489 114.657,50.512 ; R25.2 114.657,49.877 ; R26.2 114.657,51.1 ; 109.74,50.5 114.035,50.5 114.046,50.489 ; 114.046,50.489 114.657,49.877 ; 114.046,50.489 114.657,51.1 ; 114.657,49.877 114.657,50.512 ; 114.657,50.512 114.657,51.1
Net-(Q1-Pad1): Q1.1 R19.2 | length 3.8
  F.Cu w0.25: Q1.1@156.525,117.178 156.591,117.244 R19.2
Net-(Q2-Pad1): Q2.1 R20.2 | length 3.5
  F.Cu w0.25: Q2.1@169.545,117.371 R20.2
Net-(Q3-Pad1): Q3.1 R21.2 | length 4
  F.Cu w0.25: R21.2 165.354,117.012 Q3.1
Net-(R11-Pad2): R11.2 U2.4 | length 2.4
  F.Cu w0.25: U2.4 119.314,107.635 119.507,107.442 R11.2
Net-(R12-Pad2): R12.2 U2.6 | length 2.4
  F.Cu w0.25: U2.6 119.314,109.535 119.507,109.728 R12.2
Net-(R29-Pad2): R29.2 U3.42 | length 25.9
  F.Cu w0.25: v1(122.809,99.06) 123.063,98.806 123.317,98.806 ; 123.321,98.802 123.317,98.806 ; U3.42 123.317,98.806 ; R29.2 137.263,91.162 v1(138.303,92.202)
  In2.Cu w0.25: v1(122.809,99.06) 134.055,99.06 134.591,98.523 ; 134.366,98.749 134.591,98.523 ; v1@138.364,92.263 v1(138.303,92.202) 138.303,95.885 137.922,96.266 136.869,97.319 135.796,97.319 134.591,98.523
Net-(R30-Pad2): R30.2 U3.43 | length 33.4
  F.Cu w0.25: v1(121.221,98.489) 121.408,98.302 122.115,98.302 ; 121.979,98.302 122.115,98.302 ; U3.43 122.115,98.302 ; v1@137.24,85.645 v1(137.24,85.678) R30.2
  In2.Cu w0.25: v1(121.221,98.489) 121.221,97.472 122.167,96.527 136.391,96.527 137.263,95.655 137.263,85.701 v1(137.24,85.678)
OSC_IN: C8.1 U3.5 Y1.3 | length 9.4
  F.Cu w0.25: C8.1 125.937,89.746 Y1.3 126.128,89.74 127.063,90.675 127.063,93.281 127.452,93.67 U3.5
OSC_OUT: C9.1 U3.6 Y1.1 | length 7.2
  F.Cu w0.25: U3.6 127.952,95.059 128.002,95.009 128.002,93.613 128.143,93.472 Y1.1@128.143,91.948 ; 128.143,92.507 128.143,91.694 C9.1@131.318,91.694
RES: J3.5 U3.11 | length 56.9
  F.Cu w0.25: U3.11 130.452,94.337 131.132,93.657 133.789,93.657 134.297,93.657 135.128,94.488 v1(135.128,95.25)
  In2.Cu w0.25: J3.5 110.19,58.12 111.615,59.545 131.445,79.375 ; 131.572,79.502 131.445,79.375 ; v1(135.128,95.25) 135.128,92.456 133.604,90.932 133.604,81.534 131.445,79.375
RESET: C12.1 R23.2 SW1.1 U3.7 | length 70
  F.Cu w0.25: U3.7 128.452,93.799 129.494,92.757 134.827,92.757 135.382,92.202 v1(135.382,91.44) 134.874,90.932 C12.1 ; v1(171.704,80.645) R23.2 174.043,83.312 174.079,83.348 SW1.1@182.029,83.348
  In1.Cu w0.25: v1(135.382,91.44) 135.382,90.17 137.414,88.138 170.434,88.138 171.704,86.868 v1(171.704,80.645) v1@171.704,80.518
SCL: J3.3 R28.2 R29.1 | length 63
  F.Cu w0.25: R29.1 R28.2 v1(140.946,91.67) v1@140.946,91.797 ; R28.2@141.349,89.916 R28.2@141.376,89.943
  In2.Cu w0.25: J3.3 111.46,53.04 112.79,54.37 140.589,82.169 ; 140.946,82.526 140.589,82.169 ; v1(140.946,91.67) 143.153,91.67 144.108,90.715 144.108,85.688 140.716,82.296 140.589,82.169
SDA: J3.4 R27.2 R30.1 | length 53.9
  F.Cu w0.25: R30.1 141.311,87.503 R27.2 143.042,87.463 v1(143.383,87.122)
  In2.Cu w0.25: J3.4 112.73,55.58 114.155,57.005 138.874,81.724 ; 139.089,81.939 138.874,81.724 ; v1(143.383,87.122) 143.383,86.233 138.874,81.724
SEG_0: R19.1 U3.21 | length 34.8
  F.Cu w0.25: U3.21 135.656,99.802 v1(136.144,99.314) ; v1(153.416,120.904) R19.1
  In2.Cu w0.25: v1(136.144,99.314) 153.416,116.586 v1(153.416,120.904)
SEG_1: R21.1 U3.19 | length 43.9
  F.Cu w0.25: U3.19 134.116,98.802 136.144,96.774 v1(139.954,96.774) ; v1(162.179,120.904) R21.1
  In2.Cu w0.25: v1(139.954,96.774) 140.011,96.774 162.179,118.942 v1(162.179,120.904)
SEG_2: R20.1 U3.20 | length 48.5
  F.Cu w0.25: U3.20 134.886,99.302 v1(136.144,98.044) ; R20.1 167.72,122.348 v1(167.72,122.602)
  In2.Cu w0.25: v1(136.144,98.044) 160.702,122.602 161.464,122.602 v1(167.72,122.602)
USBD+: R11.1 U3.33 | length 12.6
  F.Cu w0.25: R11.1 124.333,107.442 124.389,107.436 124.441,107.417 124.489,107.387 124.528,107.348 124.558,107.3 124.577,107.248 124.583,107.192 124.583,106.767 124.589,106.711 124.608,106.658 124.638,106.611 124.677,106.571 124.725,106.541 124.777,106.523 124.833,106.517 124.889,106.523 124.941,106.541 124.989,106.571 125.028,106.611 125.058,106.658 125.077,106.711 125.083,106.767 125.083,108.117 125.089,108.173 125.108,108.226 125.138,108.273 125.177,108.313 125.225,108.343 125.277,108.361 125.333,108.367 125.389,108.361 125.441,108.343 125.489,108.313 125.528,108.273 125.558,108.226 125.577,108.173 125.583,108.117 125.583,107.692 125.589,107.636 125.608,107.584 125.638,107.536 125.677,107.497 125.725,107.467 125.777,107.448 125.833,107.442 126.289,107.442 126.952,106.779 U3.33
USBD-: R12.1 U3.32 | length 12.1
  F.Cu w0.25: R12.1 126.492,109.728 127.452,108.768 U3.32
pads on no net: DS1.6 H1.1 H2.1 H3.1 H4.1 J1.4 J1.Un1 J1.Un2 J2.7 J2.8 U3.1 U3.2 U3.3 U3.4 U3.8 U3.10 U3.14 U3.15 U3.16 U3.17 U3.38 U3.41 U3.45 U3.46 U3.Un1 U3.Un2 U3.Un3 U3.Un4 U3.Un5 U3.Un6 U3.Un7 U3.Un8 U3.Un9 U3.Un10 U3.Un11 U3.Un12 U3.Un13 U3.Un14 U3.Un15 U3.Un16

## Polygon pours and split planes (outlines as drawn)
+3V3 on F.Cu "F.Cu-+3V3" (solid, remove dead copper, pour order 0): 198.12,10.16 86.36,10.16 86.36,144.78 198.12,144.78
GND on B.Cu "B.Cu-GND" (solid, remove dead copper, pour order 1): 200.66,5.08 83.82,5.08 83.82,147.32 200.66,147.32
+3V3 on In1.Cu "In1.Cu-+3V3" (solid, remove dead copper, pour order 2): 203.2,2.54 81.915,2.54 81.915,149.225 203.2,149.225
GND on In2.Cu "In2.Cu-GND" (solid, remove dead copper, pour order 3): 205.74,0 78.74,0 78.74,149.86 205.74,149.86

## Keep-outs
Edge.Cuts:
  lines w0.05: 104,33.706 ccw(c107.15,33.706) 107.15,30.556 ; 104,33.706 ccw(c107.15,33.706) 107.15,30.556 ; 104,33.706 104.003,127.411 ; 104,33.706 104.003,127.411 ; 104.003,127.411 cw(c107.152,127.411) 107.152,130.561 ; 104.003,127.411 cw(c107.152,127.411) 107.152,130.561 ; 107.15,30.556 180.848,30.561 ; 107.15,30.556 180.848,30.561 ; 107.152,130.561 180.848,130.556 ; 107.152,130.561 180.848,130.556 ; 180.848,30.561 ccw(c180.848,33.711) 183.998,33.711 ; 180.848,30.561 ccw(c180.848,33.711) 183.998,33.711 ; 180.848,130.556 cw(c180.848,127.406) 183.998,127.406 ; 180.848,130.556 cw(c180.848,127.406) 183.998,127.406 ; 180.848,130.556 cw(c180.848,127.406) 183.998,127.406 ; 180.848,130.556 cw(c180.848,127.406) 183.998,127.406 ; 180.848,130.556 183.998,127.406 ; 183.998,33.711 183.998,127.406 ; 183.998,33.711 183.998,127.406

## Silkscreen, mask and mechanical layers (free items; w line width, h text height)
F.SilkS:
  circle w0.15: c124.587,94.742 r0.18
  text "FPS_Anzeige_V2" at 157.459,127.178 h1
  text "JLCJLCJLCJLC" at 142.009,57.746 h1.5
B.SilkS:
  text "Kraus Anton  / Prillwitz Robin" at 160.896,126.135 h1
Dwgs.User:
  lines w0.15: 106,33.56 181,33.56 181,78.56 106,78.56 106,33.56

## Dimensions
184,30.56 to 184,130.56 on Dwgs.User
104,30.56 to 184,30.56 on Dwgs.User
144,26.56 to 184,26.56 on Dwgs.User
186,80.56 to 186,30.56 on Dwgs.User
159.5,130.56 to 184,130.56 on Dwgs.User
106,63.56 to 106,33.56 on Dwgs.User